# Altium PCB TYPE-C FEMALE 16PIN C720628.pcbdoc
Units mil, origin at the board's own origin, x right, y up, seen from the top; angles counter-clockwise.
Board outline 860 x 716.54 mil, 2 copper layers (Top Layer, Bottom Layer); 1 components, 0 nets, 20 pads, 0 vias.
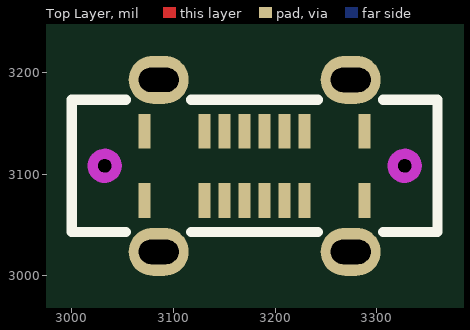
[diagram p0: Top Layer view]
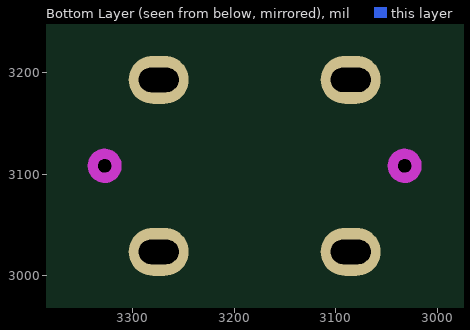
[diagram p1: Bottom Layer view, seen from below]

## Layer stack, top to bottom
Top Solder Mask Layer: solder mask 0.4, Solder Resist, Dk 3.5
Top Layer: signal copper 1.4
Dielectric1: dielectric 12.6, FR-4, Dk 4.8
Bottom Layer: signal copper 1.4
Bottom Solder Mask Layer: solder mask 0.4, Solder Resist, Dk 3.5

## Board outline
3610,2750 2750,2750 2750,3466.54 3610,3466.54

## Design rules (kind name [scope] priority, off if disabled: settings)
BoardOutlineClearance safeClearance_1 [All] p1: gap=10 ignorepadtopadclearanceinfootprint=FALSE except(0: Arc-SplitContinuation Track-SplitContinuation SMDPad-SplitContinuation THPad-SplitContinuation Via-SplitContinuation Fill-SplitContinuation Poly-SplitContinuation Region-SplitContinuation Text-SplitContinuation; 6: Track-CutoutEdge SMDPad-CutoutEdge THPad-CutoutEdge Via-CutoutEdge Fill-CutoutEdge Region-CutoutEdge; 11.8: Track-OutlineEdge SMDPad-OutlineEdge THPad-OutlineEdge Via-OutlineEdge Fill-OutlineEdge Poly-OutlineEdge Region-OutlineEdge Text-OutlineEdge)
Clearance safeClearance [All] p1: gap=6 ignorepadtopadclearanceinfootprint=FALSE except(6.9: Track-Hole SMDPad-Hole THPad-Hole Via-Hole Fill-Hole Poly-Hole Region-Hole Text-Hole; 7: Arc-Arc Arc-Track Arc-SMDPad Arc-THPad Arc-Via Arc-Fill Arc-Poly Arc-Region Arc-Text Arc-Hole)
DiffPairsRouting differentialPair [All] p1: maxlimit=6 minlimit=6 mostfreqgap=6 toplayer_minwidth=5 toplayer_maxwidth=100 toplayer_prefwidth=10 bottomlayer_minwidth=5 bottomlayer_maxwidth=100 bottomlayer_prefwidth=10 maxuncoupledlength=10
PasteMaskExpansion pasteMaskExpansion [All] p1: expansion=0
PlaneConnect innerPlane [All] p1: planeconnectstyle=Relief reliefexpansion=20 reliefentries=4 reliefconductorwidth=10 reliefairgap=10
PolygonConnect copperRegion [All] p1: connectstyle=Relief reliefconductorwidth=10 reliefentries=4 polygonreliefangle="90 Angle" airgapwidth=10
RoutingVias viaSize [All] p1: holewidth=12.01 width=24.02 viastyle="Through Hole" minholewidth=11.81 minwidth=19.68 maxholewidth=236.22 maxwidth=393.7
SolderMaskExpansion solderMaskExpansion [All] p1: expansion=2 istentingtop=FALSE useseparateexpansions=TRUE expansionbottom=2 istentingbottom=FALSE
Width trackWidth [All] p1: maxlimit=100 minlimit=5 preferedwidth=10
27 further rules are at their usual default settings.

## Components (designator, comment, footprint, x,y, rotation, side; value= is the part's Value field where it differs from the comment)
? "USB-C-SMD_TYPEC-303-ACP16" USB-C-SMD_TYPEC-303-ACP16 3180,3108.27 r0 top

## Footprints (in the part's own frame and the unit in brackets; to place one, negate y for a bottom-side part, rotate by r counter-clockwise, add the part's x,y. Pads: shape width x height; smd on the part's side, far side on the other; paste and mask are expansions set on the pad)
USB-C-SMD_TYPEC-303-ACP16 [mm]
  oval 1.5x1.2 hole 0.61 slot 1 at 0 deg: 1(-2.4,2.15) 2(-2.4,-2.15) 3(2.4,2.15) 4(2.4,-2.15)
  rect 0.3x0.87 smd paste-100 mask+0.051: A1(-2.75,0.865) A4(-1.25,0.865) A5(-0.75,0.865) A6(-0.25,0.865) A7(0.25,0.865) A8(0.75,0.865) A9(1.25,0.865) A12(2.75,0.865) B1(2.75,-0.865) B4(1.25,-0.865) B5(0.75,-0.865) B6(0.25,-0.865) B7(-0.25,-0.865) B8(-0.75,-0.865) B9(-1.25,-0.865) B12(-2.75,-0.865)
  Board Outline Layer board cut-out: -3.45,0 -3.491,0.149 -3.601,0.257 -3.75,0.297 -3.899,0.257 -4.009,0.149 -4.05,0 -4.05,0 -4.009,-0.149 -3.899,-0.258 -3.75,-0.297 -3.601,-0.258 -3.491,-0.149 -3.45,0 -3.45,0
  Board Outline Layer board cut-out: 4.05,0 4.009,0.149 3.899,0.257 3.75,0.297 3.601,0.257 3.491,0.149 3.45,0 3.45,0 3.491,-0.149 3.601,-0.258 3.75,-0.297 3.899,-0.258 4.009,-0.149 4.05,0 4.05,0
  Board Outline Layer circle w0.025: c-3.75,0 r0.3
  Board Outline Layer circle w0.254: c-3.75,0 r0.3
  Board Outline Layer circle w0.025: c3.75,0 r0.3
  Board Outline Layer circle w0.254: c3.75,0 r0.3
  silkscreen extent -4.57,-1.65 4.57,1.65

## Nets (pads, with @x,y where several pads share a name; then routed paths per layer and width w, separated by ;. In a path a pad name is that pad's centre, name@x,y a point inside that pad or via, vN(x,y) a via of type N, cw(c..) or ccw(c..) an arc to the next point about the centre after c; other vN are vias at no path point)
pads on no net: ?.1 ?.2 ?.3 ?.4 ?.A1 ?.A4 ?.A5 ?.A6 ?.A7 ?.A8 ?.A9 ?.A12 ?.B1 ?.B4 ?.B5 ?.B6 ?.B7 ?.B8 ?.B9 ?.B12